# Altium PCB PCB1a.PcbDoc
Units mil, origin at the board's own origin, x right, y up, seen from the top; angles counter-clockwise.
Board outline 6000 x 4000 mil, 2 copper layers (Top Layer, Bottom Layer); 4 components, 6 nets, 40 pads, 0 vias.
Unrouted connection lines stored in the file: 24.
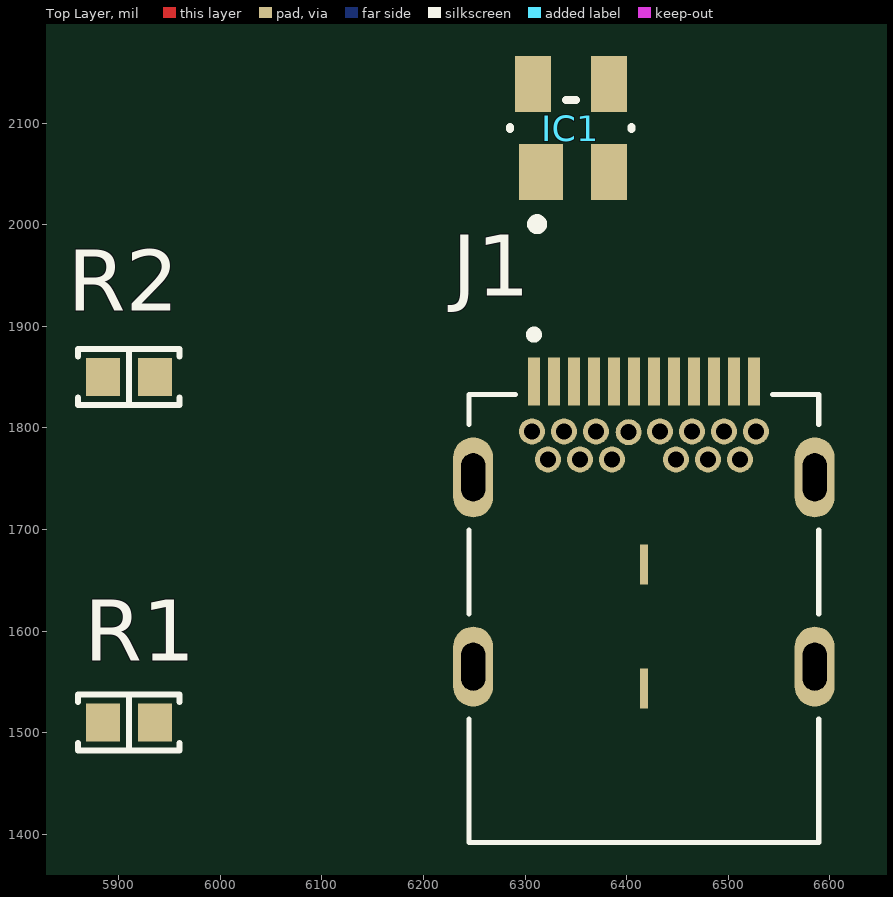
[diagram p0: Top Layer view]
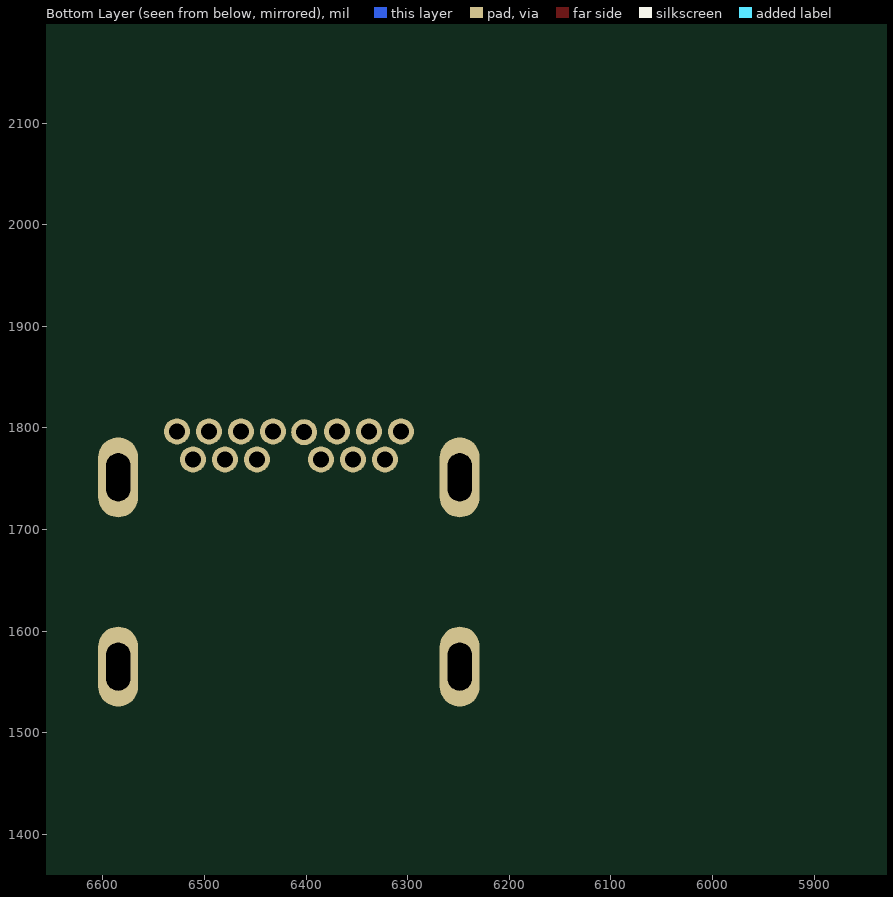
[diagram p1: Bottom Layer view, seen from below]

## Layer stack, top to bottom
Top Solder: solder mask 0.4, Solder Resist, Dk 3.5
Top Layer: signal copper 1.4
Dielectric 1: dielectric 12.6, FR-4, Dk 4.8
Bottom Layer: signal copper 1.4
Bottom Solder: solder mask 0.4, Solder Resist, Dk 3.5

## Board outline
1000,1000 7000,1000 7000,5000 1000,5000

## Design rules (kind name [scope] priority, off if disabled: settings)
Clearance [All] p1: gap=10 ignorepadtopadclearanceinfootprint=TRUE except(0: Arc-Hole Track-Hole SMDPad-Hole THPad-Hole Via-Hole Fill-Hole Poly-Hole Region-Hole Text-Hole)
PolygonConnect [All] p1: connectstyle=Relief reliefconductorwidth=10 reliefentries=4 polygonreliefangle="90 Angle" airgapwidth=10
RoomDefinition Sheet1 [InComponent('No Component')] p1: confinementstyle=ConfineIn formatcopy=TRUE lockcomponents=FALSE outline 5920,360 6860,360 6860,990 5920,990
RoutingVias [All] p1: holewidth=28 width=50 viastyle="Through Hole" minholewidth=28 minwidth=50 maxholewidth=28 maxwidth=50
SolderMaskExpansion [All] p1: expansion=4 istentingtop=FALSE
Width [All] p1: maxlimit=10 minlimit=10 preferedwidth=10
30 further rules are at their usual default settings.

## Components (designator, comment, footprint, x,y, rotation, side; value= is the part's Value field where it differs from the comment)
IC1 "SP3003-02CTG" Littelfuse_SR05_MFG 6345,2095 r0 top
J1 "632723100011" WURTH_632723100011 6416.89,1845.71 r0 top value=USB_Type_C
R1 "5k11" 0603_R 5910,1510 r0 top
R2 "5k11" 0603_R 5910,1850 r0 top

## Footprints (in the part's own frame and the unit in brackets; to place one, negate y for a bottom-side part, rotate by r counter-clockwise, add the part's x,y. Pads: shape width x height; smd on the part's side, far side on the other; paste and mask are expansions set on the pad)
0603_R [mm]
  rect 0.85x0.95 smd: 1(-0.65,0) 2(0.65,0)
  silkscreen extent -1.27,-0.7 1.27,0.7, body extent -0.8,-0.4 0.8,0.4, height 0.45
Littelfuse_SR05_MFG [mm]
  rect 1.1x1.4 smd paste+0 mask+0: 1(-0.75,-1.1)
  rect 0.9x1.4 smd paste+0 mask+0: 2(0.95,-1.1) 3(0.95,1.1) 4(-0.95,1.1)
  silkscreen extent -1.52,-2.52 1.52,0.7, body extent -1.62,-1.9 1.62,1.9, height 0.25
WURTH_632723100011 [mm]
  rect 0.3x1.2 smd: A1(-2.75,0) A2(-2.25,0) A3(-1.75,0) A4(-1.25,0) A5(-0.75,0) A6(-0.25,0) A7(0.25,0) A8(0.75,0) A9(1.25,0) A10(1.75,0) A11(2.25,0) A12(2.75,0)
  round 0.65 hole 0.4: B1(2.8,-1.25) B2(2.4,-1.95) B3(1.6,-1.95) B4(1.2,-1.25) B5(0.8,-1.95) B6(0.4,-1.25) B7(-0.381,-1.27) B8(-0.8,-1.95) B9(-1.2,-1.25) B10(-1.6,-1.95) B11(-2.4,-1.95) B12(-2.8,-1.25) G1(-2,-1.25) G2(2,-1.25)
  oval 1x2 hole 0.6 slot 1.2 at 90 deg: S1(-4.27,-2.4) S2(4.27,-2.4) S3(-4.27,-7.13) S4(4.27,-7.13)
  rect 0.2x1 smd: S5(0,-4.58) S6(0,-7.68)
  silkscreen extent -4.37,-11.53 4.37,1.27, body extent -4.37,-11.54 4.37,0.25, height 2.98

## Part data
IC1: "SR05 Series 5V 25A", Manufacture Name=Littelfuse, Package=SOT143, Category="ESD Suppressors", MPN=SP3003-02CTG, SPN=576-SR05-02CTG, Supplier Name=Mouser
J1: "USB-C _USB TYPE-C_ USB 3.1 _USB 3.1 Gen 2, Superspeed+_ Receptacle Connector 24 Position Surface Mount, Right Angle; Through Hole", Package=SMD_PTH, Category=Connector, MF="Wurth Electronics", MP=632723100011
R1 R2: library part RC0603FR-075K11L, "5k11,  1% , 100ppm, 0.100W, 0603, SMD", Device Package="1608 (0603 Metric)", Manufacturer=Yageo, PowerRating="0.100W, 1/10W", TemperatureCoefficient=100ppm/C, TemperatureRange="-55C ~ 155C", Tolerance=1%, Category=Resistor, Part Number=RC0603FR-075K11L, Price=0.0089

## Nets (pads, with @x,y where several pads share a name; then routed paths per layer and width w, separated by ;. In a path a pad name is that pad's centre, name@x,y a point inside that pad or via, vN(x,y) a via of type N, cw(c..) or ccw(c..) an arc to the next point about the centre after c; other vN are vias at no path point)
DP+: IC1.2 J1.A6 J1.B6
DP-: IC1.3 J1.A7 J1.B7
GND: IC1.1 J1.A1 J1.A12 J1.B1 J1.B12 J1.G1 J1.G2 J1.S1 J1.S2 J1.S3 J1.S4 J1.S5 J1.S6 R1.1 R2.1
NetJ1_A5: J1.A5 R2.2
NetJ1_B5: J1.B5 R1.2
VCC: IC1.4 J1.A4 J1.A9 J1.B4 J1.B9
pads on no net: J1.A2 J1.A3 J1.A8 J1.A10 J1.A11 J1.B2 J1.B3 J1.B8 J1.B10 J1.B11

## Text inside footprints (layer, text, board x,y; h text height)
J1: Mechanical 13 "PCB Edge" at 6318.46,1442.17 h32